# Altium PCB PCB1.PcbDoc
Units mm, origin at the board's own origin, x right, y up, seen from the top; angles counter-clockwise.
Board outline 26 x 18 mm, 2 copper layers (Top Layer, Bottom Layer); 12 components, 14 nets, 43 pads, 27 vias.
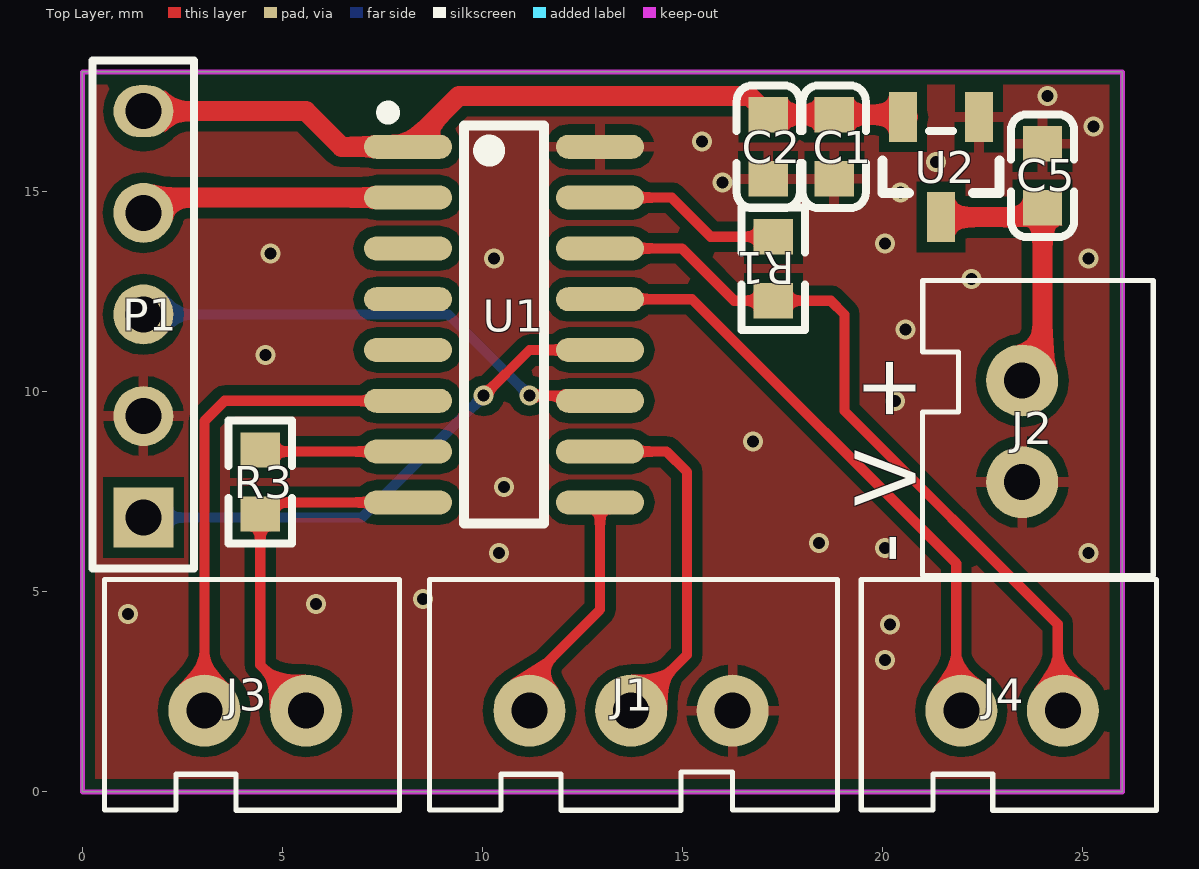
[diagram p0: Top Layer view]
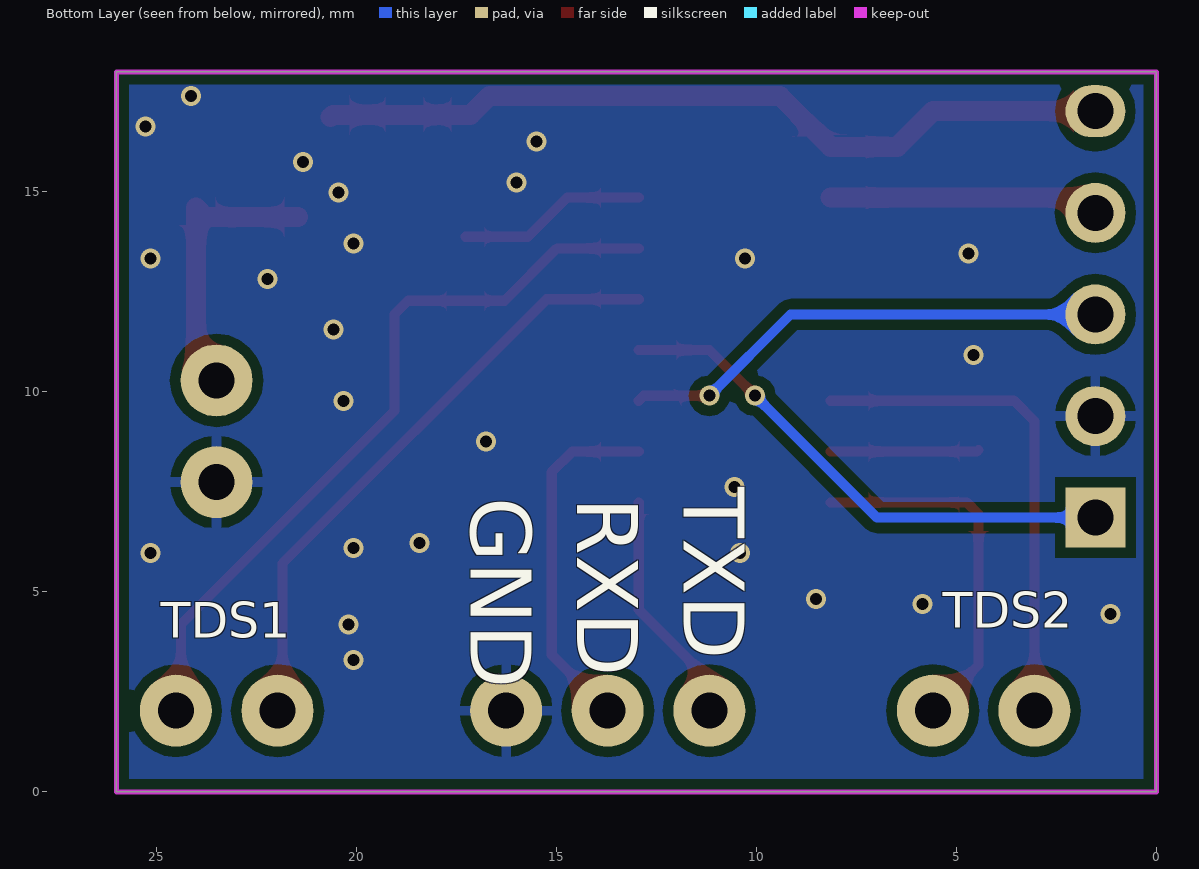
[diagram p1: Bottom Layer view, seen from below]
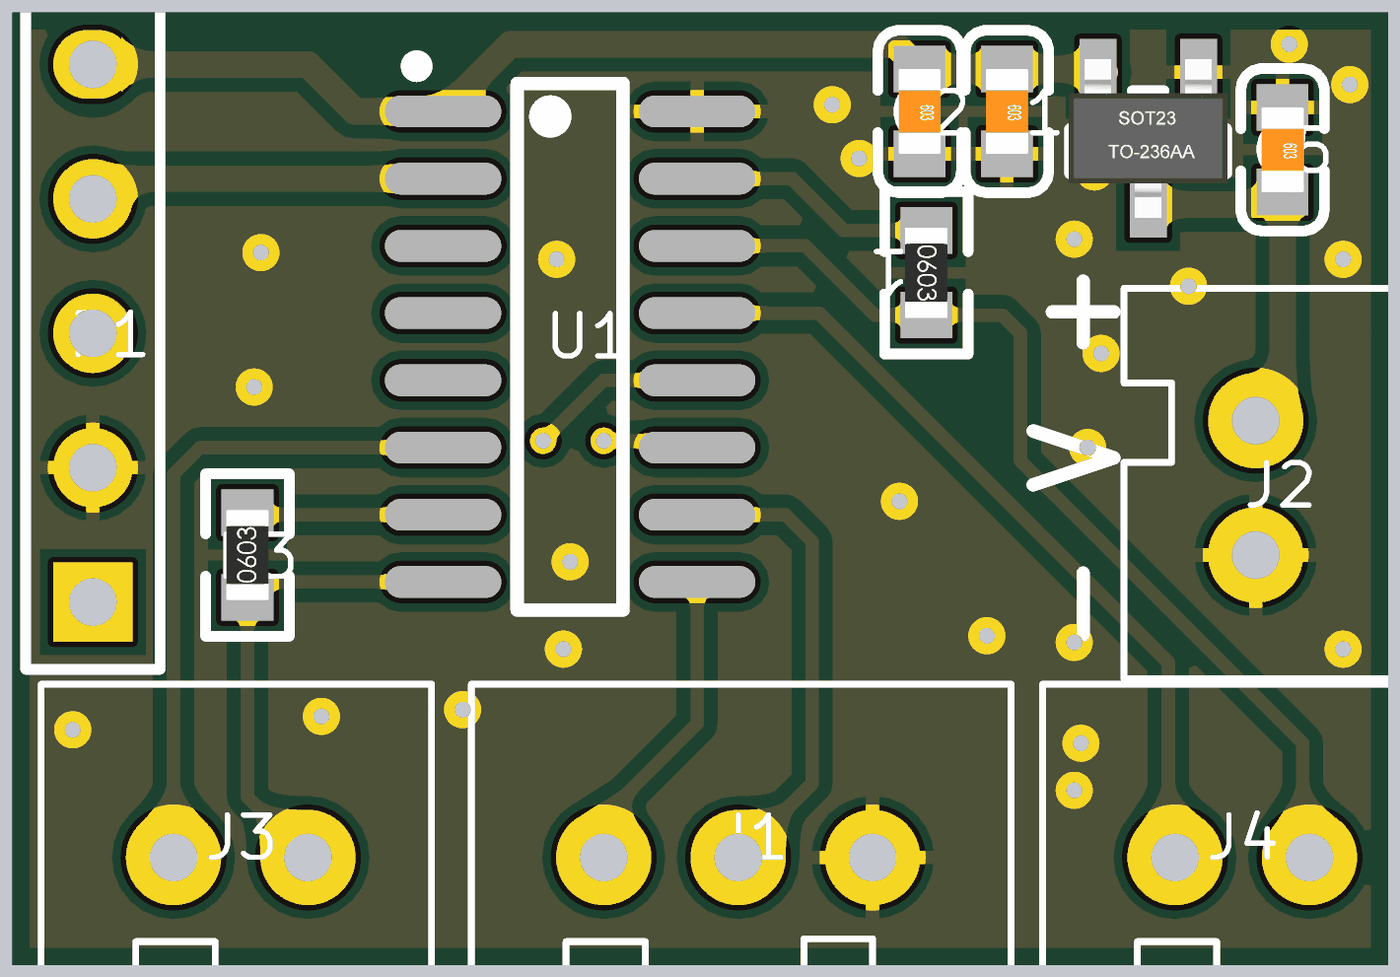
[diagram p2: 3D render of the assembled board from above, using the file's embedded part models]

## Layer stack, top to bottom
Top Solder: solder mask 0.0102, Solder Resist, Dk 3.5
Top Layer: signal copper 0.0356
Dielectric 1: dielectric 0.32, FR-4, Dk 4.8
Bottom Layer: signal copper 0.0356
Bottom Solder: solder mask 0.0102, Solder Resist, Dk 3.5

## Board outline
0,0 26,0 26,18 0,18

## Design rules (kind name [scope] priority, off if disabled: settings)
Clearance [All] p1: gap=0.254
HoleToHoleClearance [All] p1: gap=0 allowstackedmicrovias=TRUE
MinimumSolderMaskSliver [All] p1: minsoldermaskwidth=0
PolygonConnect PolygonConnect_2 [IsVia] p1: connectstyle=Direct reliefconductorwidth=0.254 reliefentries=4 polygonreliefangle="90 Angle" airgapwidth=0.254
PolygonConnect PolygonConnect_1 [InNet('GND')] p2: connectstyle=Relief reliefconductorwidth=0.254 reliefentries=4 polygonreliefangle="90 Angle" airgapwidth=0.254
PolygonConnect [All] p3: connectstyle=Direct reliefconductorwidth=0.254 reliefentries=4 polygonreliefangle="90 Angle" airgapwidth=0.254
RoutingVias [All] p1: holewidth=0.711 width=1.27 viastyle="Through Hole" minholewidth=0.3 minwidth=0.5 maxholewidth=0.711 maxwidth=1.27
SilkToSilkClearance [All] p1: silktosilkclearance=0
SilkToSolderMaskClearance [IsPad] p1: minsilkscreentomaskgap=0 clearancetoexposedcopper=TRUE
SolderMaskExpansion [All] p1: expansion=0.102
Width [All] p1: maxlimit=1 minlimit=0.254 preferedwidth=0.254
26 further rules are at their usual default settings.

## Components (designator, comment, footprint, x,y, rotation, side; value= is the part's Value field where it differs from the comment)
C1 "10uF" LC-0603_C 18.796,16.129 r270 top
C2 "100nF" LC-0603_C 17.145,16.129 r270 top
C5 "10uF" LC-0603_C 24.003,15.405 r270 top
J1 "2.54-3P立式" 3P2.54 11.176,2.032 r0 top
J2 "2.54-2P立式" 2P2.54 23.495,10.287 r270 top
J3 "2.54-2P立式" 2P2.54 3.048,2.032 r0 top
J4 "2.54-2P立式" 2P2.54 21.971,2.032 r0 top
P1 "Header 5" HDR1X5 1.524,6.858 r90 top
R1 "51R 1%" LC-0603_R 17.272,13.081 r270 top
R3 "510R 1%" LC-0603_R 4.445,7.747 r90 top
U1 "TDS" LC-SOIC-16_150mil 10.541,11.684 r270 top
U2 "XC6206P332MR" LC-SOT-23(SOT-23-3) 21.463,15.621 r90 top

## Footprints (in the part's own frame and the unit in brackets; to place one, negate y for a bottom-side part, rotate by r counter-clockwise, add the part's x,y. Pads: shape width x height; smd on the part's side, far side on the other; paste and mask are expansions set on the pad)
2P2.54 [mm]
  round 1.8 hole 0.9: 1(0,0) 2(2.54,0)
  silkscreen extent -2.5,-2.49 4.88,3.27
3P2.54 [mm]
  round 1.8 hole 0.9: 1(0,0) 2(2.54,0) 3(5.08,0)
  silkscreen extent -2.5,-2.49 7.7,3.27
HDR1X5 [mm] "Connector; Header; 5 Position"
  rect 1.5x1.5 hole 0.9: 1(0,0)
  round 1.5 hole 0.9: 2(2.54,0) 3(5.08,0) 4(7.62,0)
  oval 1.3x1.5 hole 0.9: 5(10.16,0)
  silkscreen extent -1.27,-1.27 11.43,1.27
LC-0603_C [mm]
  rect 0.88x0.98 smd: 1(-0.8,0) 2(0.8,0)
  silkscreen extent -1.53,-0.79 1.54,0.79, body extent -0.8,-0.4 0.8,0.4, height 0.3
LC-0603_R [mm]
  rect 0.88x0.98 smd: 1(-0.8,0) 2(0.8,0)
  silkscreen extent -1.53,-0.79 1.54,0.79, body extent -0.85,-0.4 0.85,0.4, height 0.56
LC-SOIC-16_150mil [mm]
  oval 0.6x2.2 smd: 1(-4.445,-2.4) 2(-3.175,-2.4) 3(-1.905,-2.4) 4(-0.635,-2.4) 5(0.635,-2.4) 6(1.905,-2.4) 7(3.175,-2.4) 8(4.445,-2.4) 9(4.445,2.4) 10(3.175,2.4) 11(1.905,2.4) 12(0.635,2.4) 13(-0.635,2.4) 14(-1.905,2.4) 15(-3.175,2.4) 16(-4.445,2.4)
  silkscreen extent -5.45,-3.05 4.97,1
LC-SOT-23(SOT-23-3) [mm]
  rect 1.25x0.7 smd: 1(1.25,-0.95) 2(-1.25,0) 3(1.25,0.95)
  silkscreen extent -0.65,-1.46 0.9,1.46, body extent -1.5,-1.5 1.5,1.5, height 1.3

## Part data
C1 C2 C5: library part C0603
P1: "Header, 5-Pin"
R1 R3: library part R0603
U1: library part BC8003D
U2: library part HT75XX_SOT89

## Via types
v1: diameter 0.5, hole 0.3, Top Layer to Bottom Layer, 27 vias

## Nets (pads, with @x,y where several pads share a name; then routed paths per layer and width w, separated by ;. In a path a pad name is that pad's centre, name@x,y a point inside that pad or via, vN(x,y) a via of type N, cw(c..) or ccw(c..) an arc to the next point about the centre after c; other vN are vias at no path point)
3.3V: C1.1 C2.1 P1.5 U1.1 U2.3 | length 20.2
  Top Layer w0.5: P1.5 5.588,17.018 6.477,16.129 U1.1 9.411,17.399 16.675,17.399 C2.1 C1.1 20.582,16.929 U2.3@20.64,16.871
5V: C5.2 J2.1 U2.2 | length 7.2
  Top Layer w0.5: U2.2 23.769,14.371 C5.2 24.003,10.795 J2.1
GND: C1.2 C2.2 C5.1 J1.3 J2.2 P1.2 U1.16 U2.1
  other v1: 20.066,3.302 20.193,4.191 1.143,4.445 5.842,4.699 8.509,4.826 10.414,5.969 25.146,5.969 20.066,6.096 18.415,6.223 10.541,7.62 16.764,8.763 20.32,9.779 4.572,10.922 20.574,11.557 22.225,12.827 10.287,13.335 25.146,13.335 4.699,13.462 20.066,13.716 20.447,14.986 16.002,15.24 21.336,15.748 15.494,16.256 25.273,16.637 24.13,17.399
NetR1_1: R1.1 U1.15 | length 4.7
  Top Layer w0.254: U1.15 14.732,14.859 15.71,13.881 R1.1
NetR3_2: R3.2 U1.7 | length 3.7
  Top Layer w0.254: R3.2 4.483,8.509 U1.7
PCL: P1.3 U1.11 | length 12.3
  Top Layer w0.254: v1(11.176,9.906) 12.814,9.906 U1.11
  Bottom Layer w0.254: P1.3 9.144,11.938 v1(11.176,9.906)
PDA: P1.1 U1.12 | length 13.2
  Top Layer w0.254: v1(10.033,9.906) 11.176,11.049 U1.12
  Bottom Layer w0.254: P1.1 6.985,6.858 v1(10.033,9.906)
RXD: J1.2 U1.10 | length 8.9
  Top Layer w0.254: U1.10 14.605,8.509 15.113,8.001 15.113,3.429 J1.2
TDS1_1: J4.1 U1.13 | length 16.1
  Top Layer w0.254: U1.13 15.24,12.319 21.844,5.715 J4.1@21.844,1.27
TDS1_2: J4.2 R1.2 U1.14 | length 19.7
  Top Layer w0.254: U1.14 14.986,13.589 16.294,12.281 R1.2 18.707,12.281 19.05,11.938 19.05,9.525 24.384,4.191 J4.2@24.384,1.27
TDS2_1: J3.1 U1.6 | length 12.5
  Top Layer w0.254: J3.1 3.048,9.271 3.556,9.779 U1.6
TDS2_2: J3.2 R3.1 U1.8 | length 9.2
  Top Layer w0.254: J3.2 4.445,3.175 R3.1 4.737,7.239 U1.8
TXD: J1.1 U1.9 | length 5.9
  Top Layer w0.254: J1.1 11.176,2.794 12.941,4.559 U1.9
VPP: P1.4 U1.2 | length 6.8
  Top Layer w0.5: P1.4 1.905,14.859 U1.2
pads on no net: U1.3 U1.4 U1.5

## Polygon pours and split planes (outlines as drawn)
GND on Bottom Layer "Top Layer-No Net" (solid, remove dead copper, pour order 10): 0,18 0,0 26,0 26,18
GND on Top Layer "Top Layer-No Net" (solid, remove dead copper, pour order 12): 0,18 0,0 26,0 26,18

## Keep-outs
Keep-Out Layer:
  the board outline again, w0.127

## Silkscreen, mask and mechanical layers (free items; w line width, h text height)
Top Overlay:
  text "- V +" at 20.828,5.715 h1.52 r90
Bottom Overlay:
  text "TXD" at 11.811,7.62 h1.52 r90
  text "RXD" at 14.478,7.366 h1.52 r90
  text "GND" at 17.145,7.366 h1.52 r90
  text "TDS2" at 5.334,3.81 h1.52
  text "TDS1" at 24.892,3.556 h1.52